# Altium PCB PCB1.PcbDoc
Units mil, origin at the board's own origin, x right, y up, seen from the top; angles counter-clockwise.
Board outline 6000 x 4000 mil, 2 copper layers (Top Layer, Bottom Layer); 5 components, 8 nets, 16 pads, 0 vias.
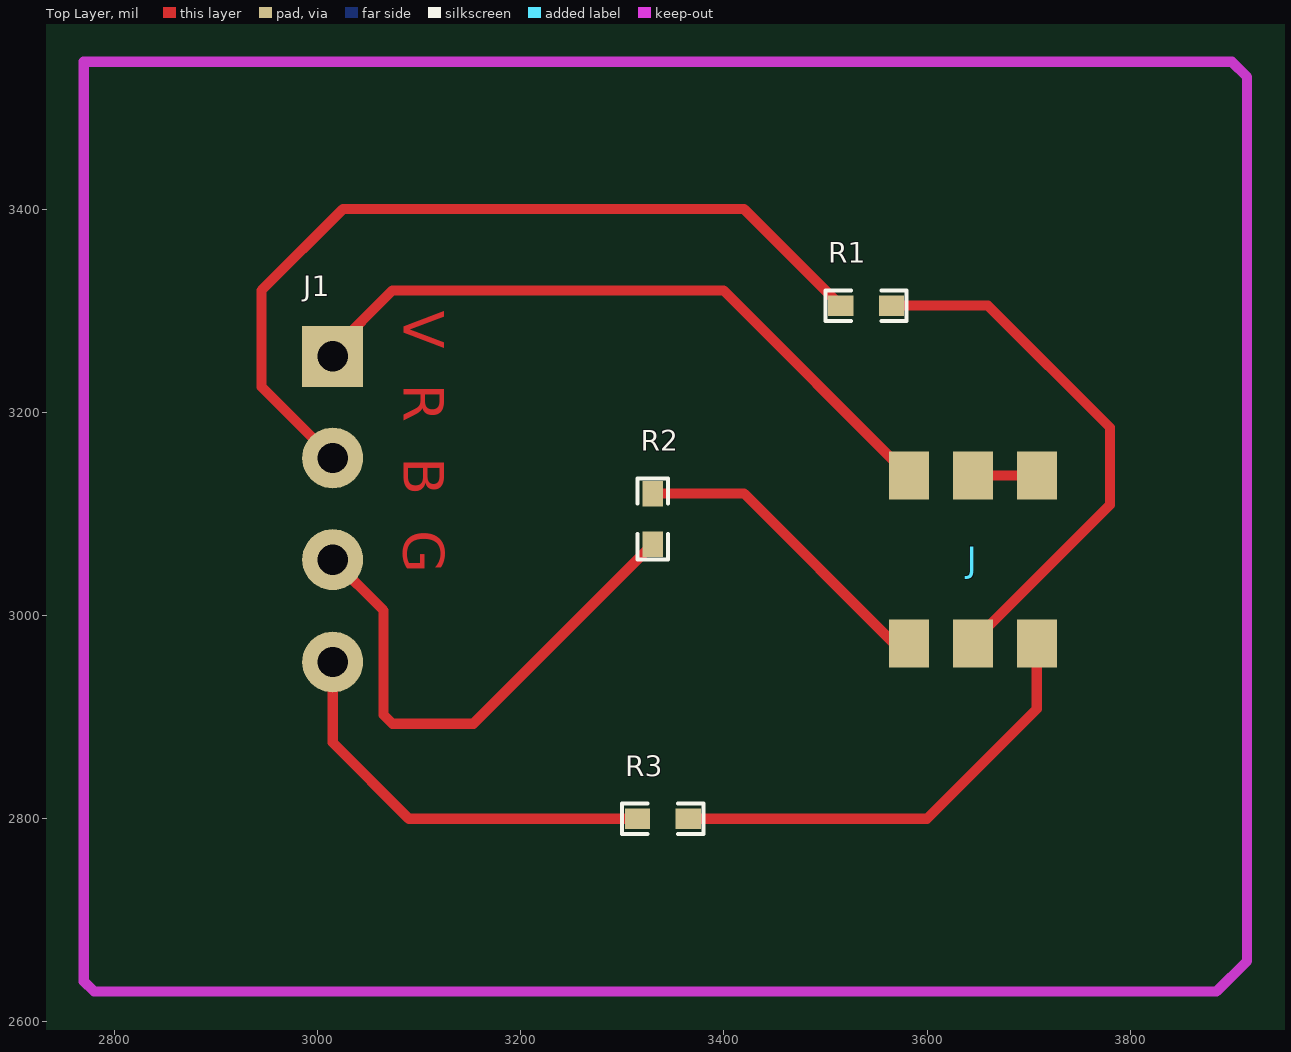
[diagram p0: Top Layer view]
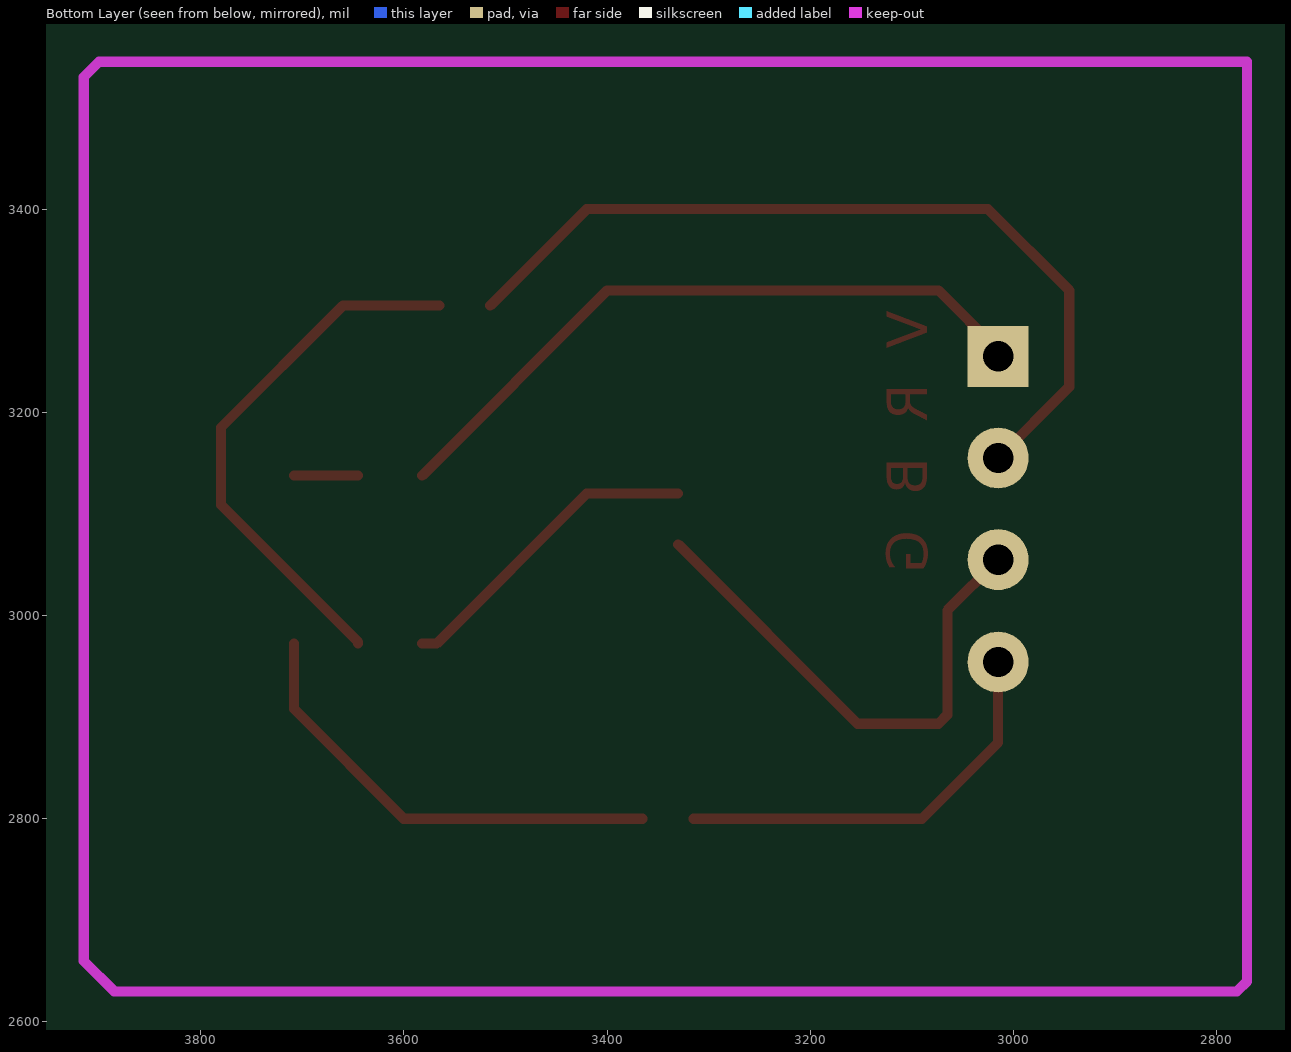
[diagram p1: Bottom Layer view, seen from below]

## Layer stack, top to bottom
Top Layer: signal copper 1.4
Dielectric: dielectric 12.6, FR-4, Dk 4.8
Bottom Layer: signal copper 1.4

## Board outline
1000,1000 7000,1000 7000,5000 1000,5000

## Design rules (kind name [scope] priority, off if disabled: settings)
Clearance [All] p1: gap=10
PolygonConnect [All] p1: connectstyle=Relief reliefconductorwidth=10 reliefentries=4 polygonreliefangle="90 Angle"
RoutingVias [All] p1: holewidth=28 width=50 viastyle="Through Hole" minholewidth=28 minwidth=50 maxholewidth=28 maxwidth=50
SilkscreenOverComponentPads [All] p1: minsilkscreentomaskgap=10
SolderMaskExpansion [All] p1: expansion=4
Width [All] p1: maxlimit=10 minlimit=10 preferedwidth=10
27 further rules are at their usual default settings.

## Components (designator, comment, footprint, x,y, rotation, side; value= is the part's Value field where it differs from the comment)
J "5050" 5050 3645,3055 r270 top
J1 "2.54" pz-2.54 3015,3255 r270 top
R1 "Res0402" 0402 3515,3305 r0 top
R2 "Res0402" 0402 3330,3070 r90 top
R3 "Res0402" 0402 3315,2800 r0 top

## Footprints (in the part's own frame and the unit in brackets; to place one, negate y for a bottom-side part, rotate by r counter-clockwise, add the part's x,y. Pads: shape width x height; smd on the part's side, far side on the other; paste and mask are expansions set on the pad)
0402 [mil]
  rect 25x20 smd: 1(0,0) 2(50,0)
  silkscreen extent -15,-15 65,15
5050 [mm]
  rect 1.2x1 smd: 1(-2.1,1.6) 2(2.1,1.6) 3(-2.1,0) 4(2.1,0) 5(-2.1,-1.6) 6(2.1,-1.6)
pz-2.54 [mil]
  rect 60x60 hole 30: 1(0,0)
  round 60 hole 30: 2(100,0) 3(200,0) 4(300.79,0)

## Nets (pads, with @x,y where several pads share a name; then routed paths per layer and width w, separated by ;. In a path a pad name is that pad's centre, name@x,y a point inside that pad or via, vN(x,y) a via of type N, cw(c..) or ccw(c..) an arc to the next point about the centre after c; other vN are vias at no path point)
NET1: J.4 R1.2 | length 533.3
  Top Layer w10: R1.2 3660,3305 3780,3185 3780,3108.85 3645,2973.85 J.4
NetJ1_1: J1.1 J.5 | length 673.1
  Top Layer w10: J1.1 3015,3261.21 3073.79,3320 3399.69,3320 J.5
NetJ1_2: J1.2 R1.1 | length 836.5
  Top Layer w10: J1.2 2945,3225 2945,3320 3025,3400 3420,3400 R1.1
NetJ1_3: J1.3 R2.1 | length 515.2
  Top Layer w10: J1.3 3065,3005 3065,2902.24 3073.79,2893.46 3153.46,2893.46 R2.1
NetJ1_4: J1.4 R3.1 | length 410.3
  Top Layer w10: J1.4 3015,2875 3090,2800 R3.1
NetJ_1: J.1 J.3 | length 63
  Top Layer w10: J.3 J.1
NetJ_2: J.2 R3.2 | length 452.1
  Top Layer w10: R3.2 3600,2800 3707.99,2907.99 J.2
NetJ_6: J.6 R2.2 | length 313.2
  Top Layer w10: R2.2 3420,3120 3567.68,2972.32 J.6

## Keep-outs
Keep-Out Layer:
  lines w10: 2770,2640 2780,2630 3885,2630 3915,2660 3915,3530 3900,3545 2770,3545 2770,2640

## Other copper
Top Layer:
  text "V  R  B  G" at 3085,3300 h40 r270